# Altium PCB ES108FC1转接.PcbDoc
Units mm, origin at the board's own origin, x right, y up, seen from the top; angles counter-clockwise.
Board outline 30.99 x 32.26 mm, 4 copper layers (Top Layer, Layer 1, Layer 2, Bottom Layer), stack 0.603 mm thick; 3 components, 47 nets, 108 pads, 107 vias.
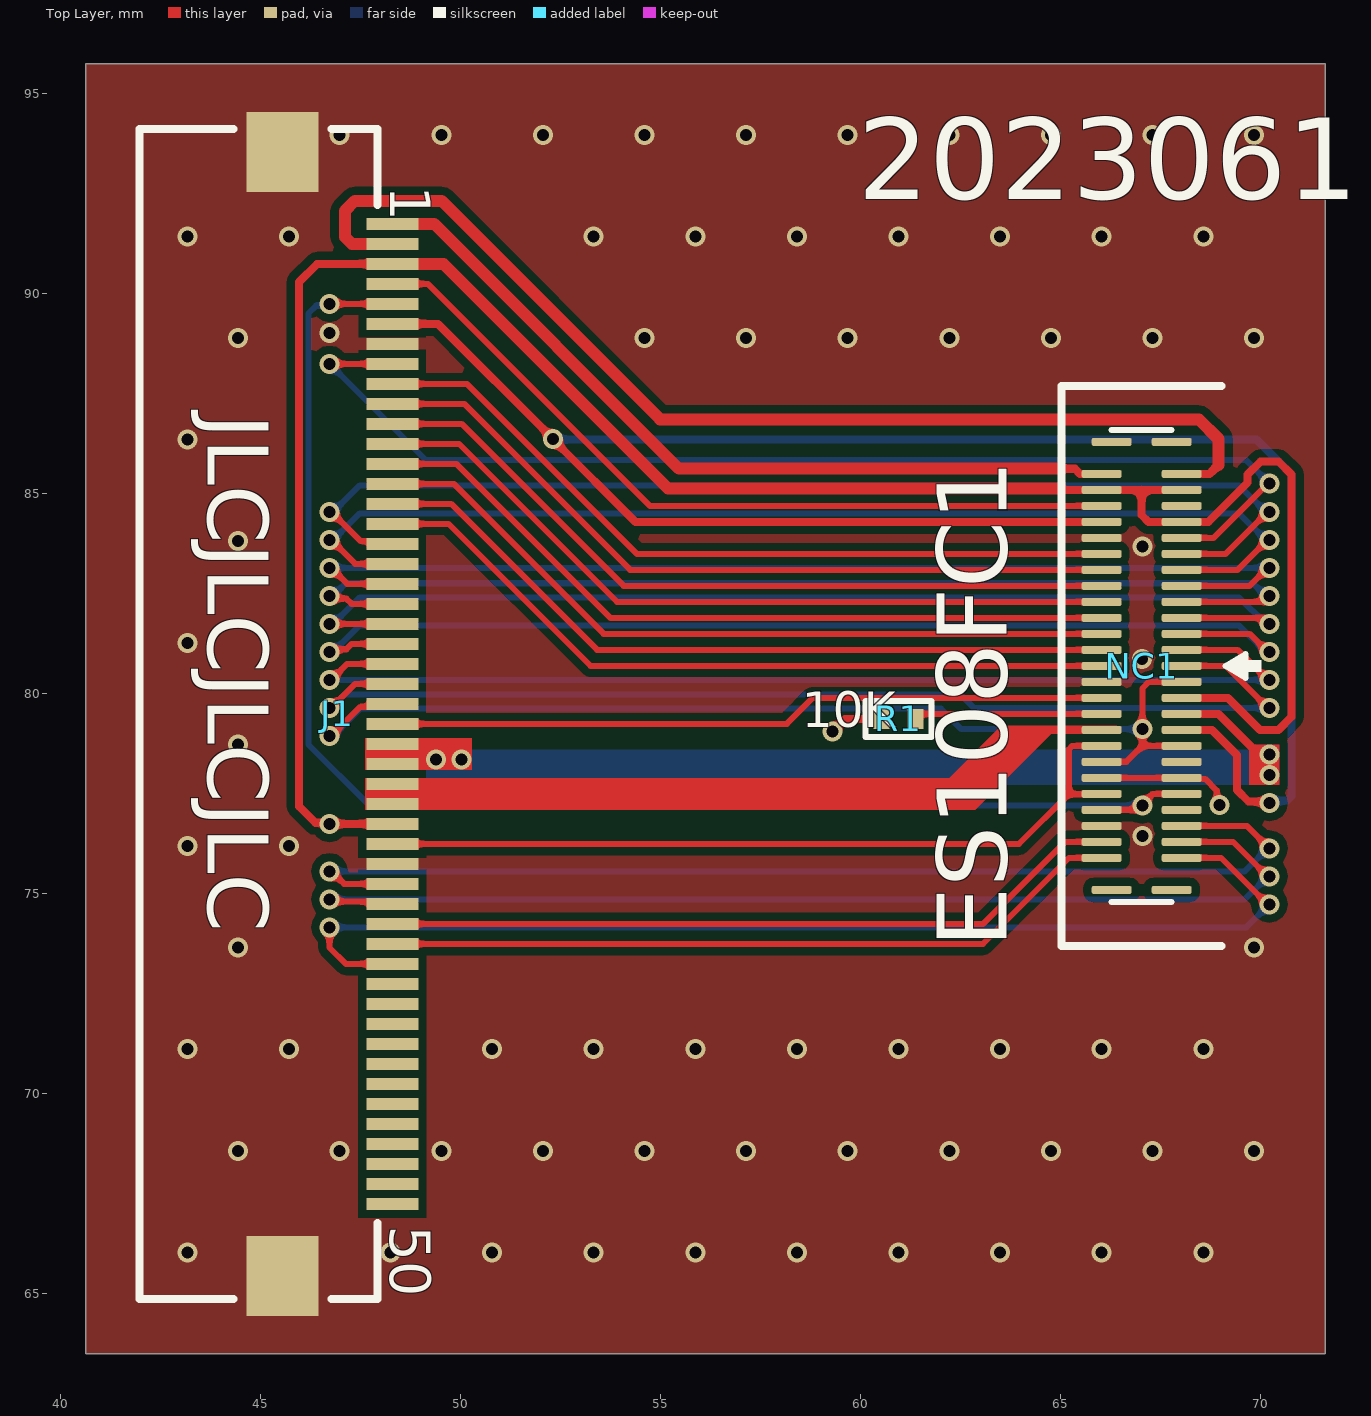
[diagram p0: Top Layer view]
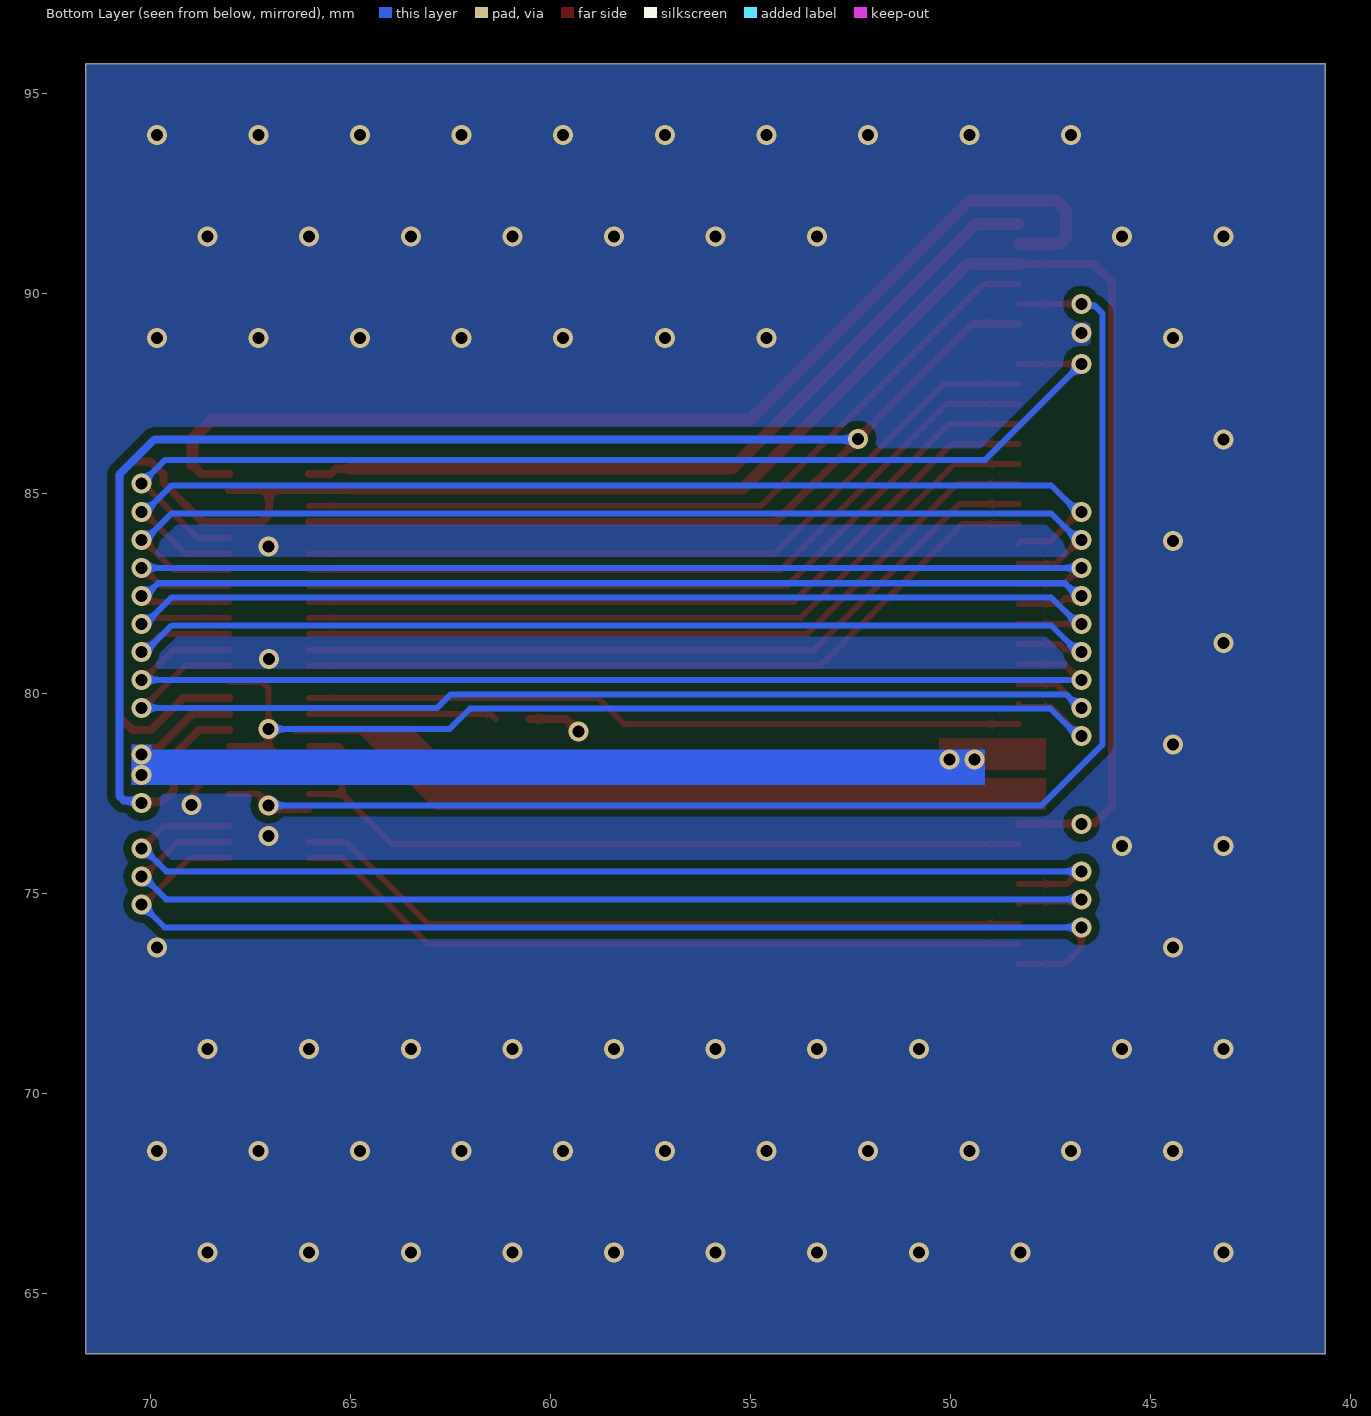
[diagram p1: Bottom Layer view, seen from below]
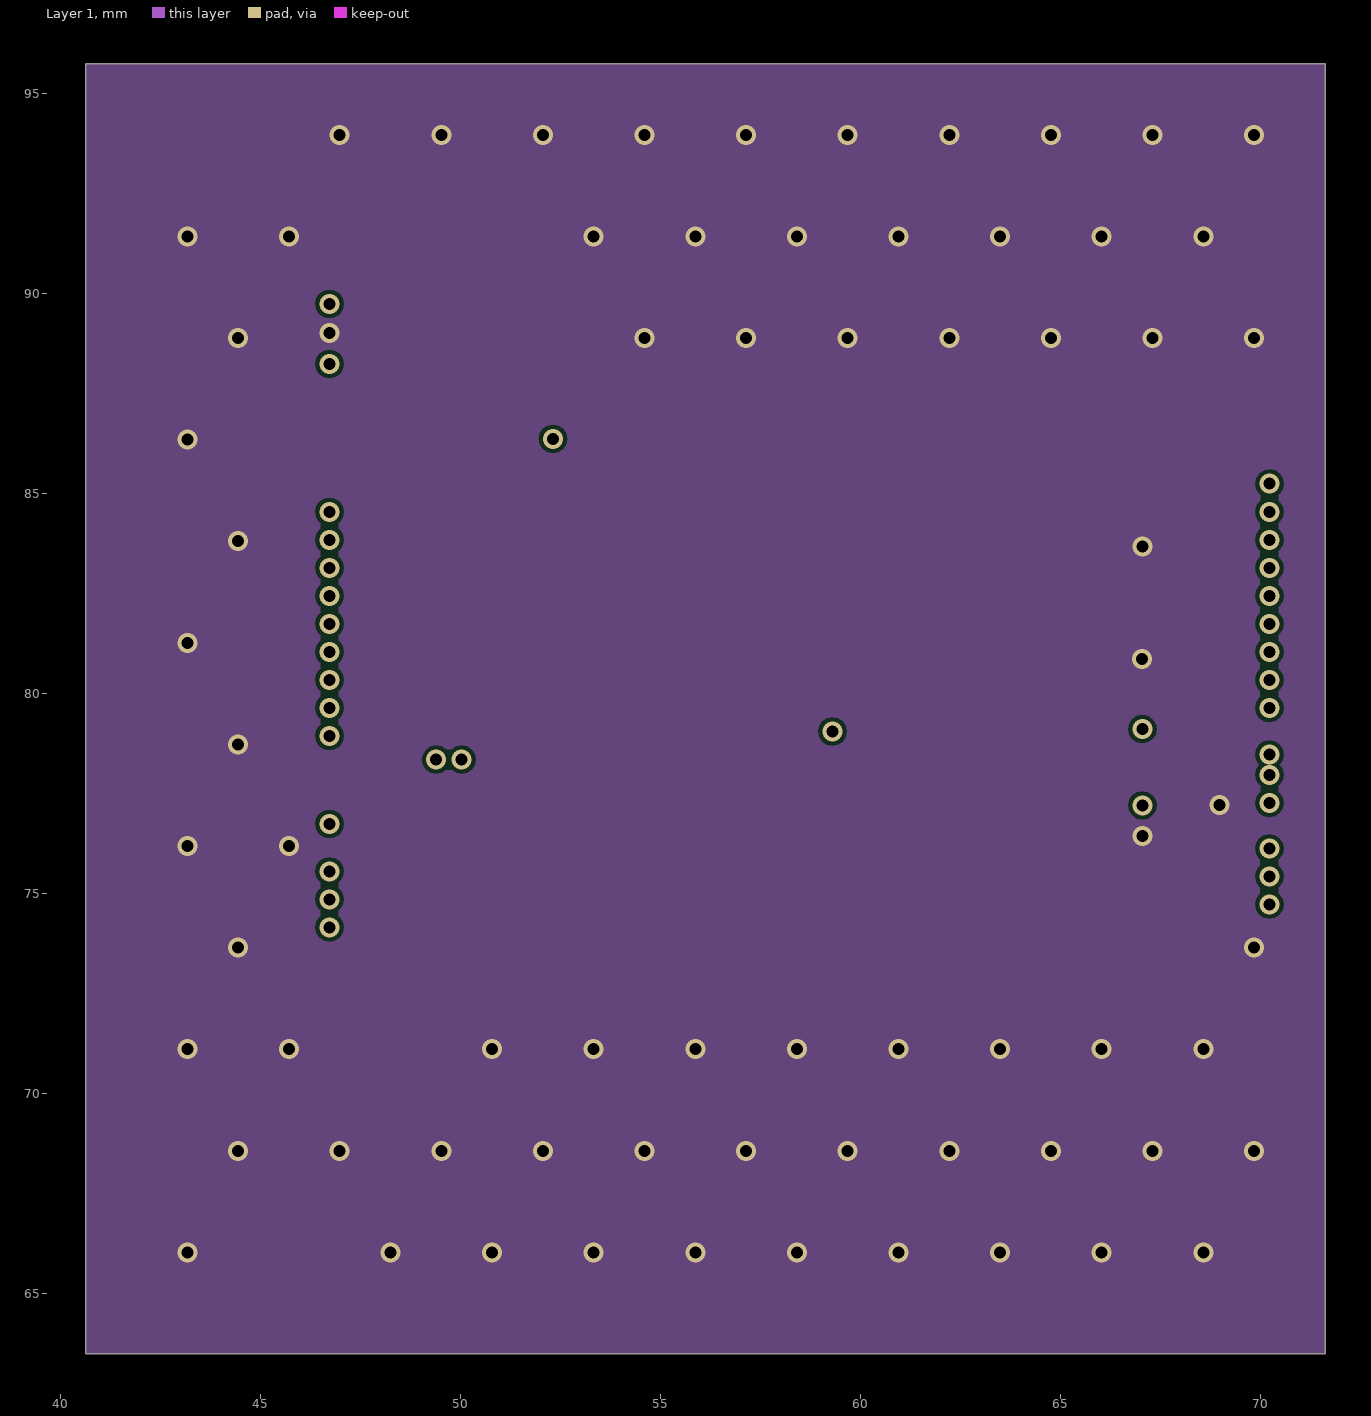
[diagram p2: Layer 1]
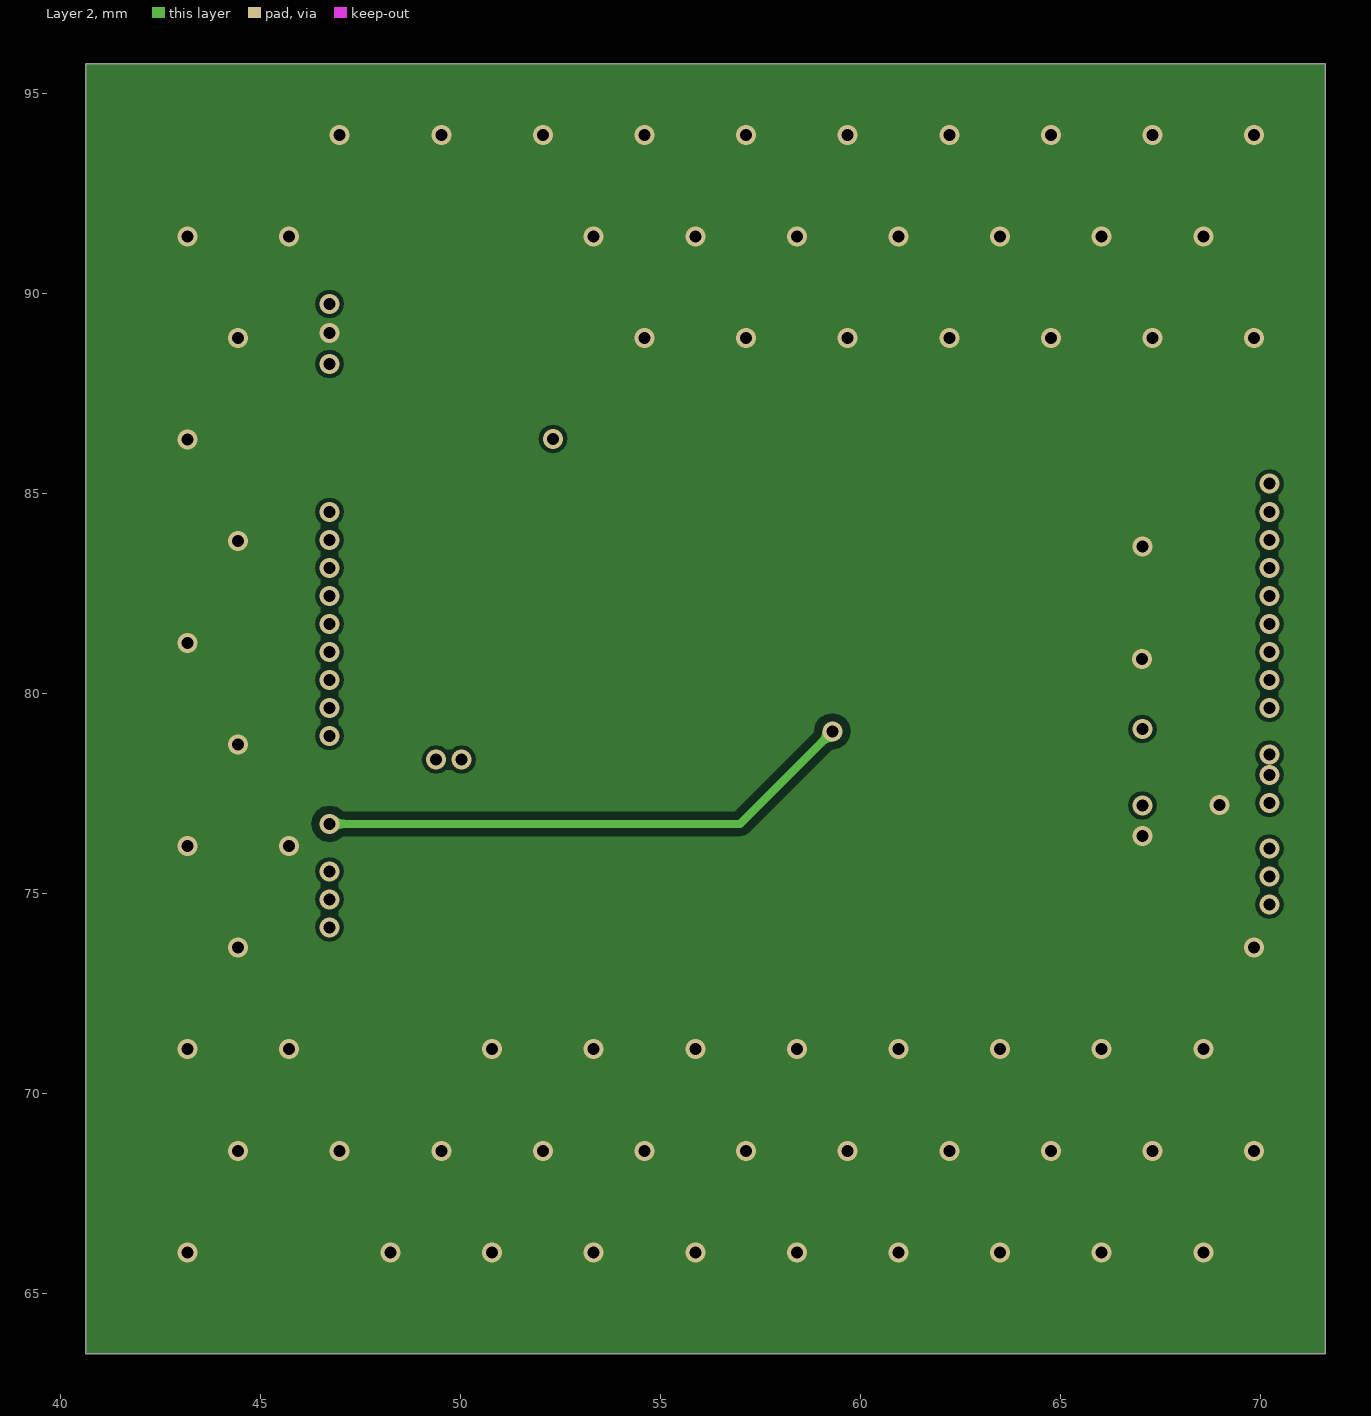
[diagram p3: Layer 2]

## Layer stack, top to bottom
Top Solder: solder mask 0.0102, Solder Resist, Dk 3.5
Top Layer: signal copper 0.0356
Dielectric 2: prepreg 0.0711, PP-006, Dk 4.1
Layer 1: signal copper 0.035
Dielectric 1: dielectric 0.32, FR-4, Dk 4.8
Layer 2: signal copper 0.035
Dielectric 3: prepreg 0.0711, PP-006, Dk 4.1
Bottom Layer: signal copper 0.0356
Bottom Solder: solder mask 0.0102, Solder Resist, Dk 3.5

## Board outline
40.64,63.5 40.64,95.758 71.628,95.758 71.628,63.5

## Design rules (kind name [scope] priority, off if disabled: settings)
Clearance [All] p1: gap=0.2 ignorepadtopadclearanceinfootprint=TRUE
HoleSize [All] p1: absolutevalues=TRUE maxlimit=2.54 minlimit=0.3 maxpercent=80.000 minpercent=20.000
HoleToHoleClearance [All] p1: gap=0 allowstackedmicrovias=TRUE
MinimumSolderMaskSliver [All] p1: minsoldermaskwidth=0
PlaneConnect [All] p1: planeconnectstyle=Direct reliefexpansion=0.508 reliefentries=4 reliefconductorwidth=0.254 reliefairgap=0.254
PolygonConnect [All] p1: connectstyle=Direct reliefconductorwidth=0.254 reliefentries=4 polygonreliefangle="90 Angle" airgapwidth=0.254
RoutingVias [All] p1: holewidth=0.3 width=0.5 viastyle="Through Hole" minholewidth=0.3 minwidth=0.5 maxholewidth=6.5 maxwidth=6.8
SilkToSilkClearance [All] p1: silktosilkclearance=0
SilkToSolderMaskClearance [IsPad] p1: minsilkscreentomaskgap=0 clearancetoexposedcopper=TRUE
SolderMaskExpansion [All] p1: expansion=0 istentingtop=FALSE
Width [All] p1: maxlimit=2.54 minlimit=0.127 preferedwidth=0.152
24 further rules are at their usual default settings.

## Components (designator, comment, footprint, x,y, rotation, side; value= is the part's Value field where it differs from the comment)
J1 "687150149022" 687150149022 44.958,79.502 r270 top
NC1 "AXE650124" AXE650124 67.04,80.702 r90 top
R1 "10K" R0402_L 60.96,79.375 r0 top

## Footprints (in the part's own frame and the unit in brackets; to place one, negate y for a bottom-side part, rotate by r counter-clockwise, add the part's x,y. Pads: shape width x height; smd on the part's side, far side on the other; paste and mask are expansions set on the pad)
687150149022 [mm] "0.50mm SMT ZIF Horizontal Hinge Type Bottom Contact, 50p"
  rect 0.3x1.3 smd: 1(-12.25,3.35) 2(-11.75,3.35) 3(-11.25,3.35) 4(-10.75,3.35) 5(-10.25,3.35) 6(-9.75,3.35) 7(-9.25,3.35) 8(-8.75,3.35) 9(-8.25,3.35) 10(-7.75,3.35) 11(-7.25,3.35) 12(-6.75,3.35) 13(-6.25,3.35) 14(-5.75,3.35) 15(-5.25,3.35) 16(-4.75,3.35) 17(-4.25,3.35) 18(-3.75,3.35) 19(-3.25,3.35) 20(-2.75,3.35) 21(-2.25,3.35) 22(-1.75,3.35) 23(-1.25,3.35) 24(-0.75,3.35) 25(-0.25,3.35) 26(0.25,3.35) 27(0.75,3.35) 28(1.25,3.35) 29(1.75,3.35) 30(2.25,3.35) 31(2.75,3.35) 32(3.25,3.35) 33(3.75,3.35) 34(4.25,3.35) 35(4.75,3.35) 36(5.25,3.35) 37(5.75,3.35) 38(6.25,3.35) 39(6.75,3.35) 40(7.25,3.35) 41(7.75,3.35) 42(8.25,3.35) 43(8.75,3.35) 44(9.25,3.35) 45(9.75,3.35) 46(10.25,3.35) 47(10.75,3.35) 48(11.25,3.35) 49(11.75,3.35) 50(12.25,3.35)
  rect 2x1.8 smd: MP1(-14.05,0.6) MP2(14.05,0.6)
  silkscreen extent -14.62,-2.98 14.63,2.98, body extent -14.55,-2.9 14.55,3.6, height 2.25
AXE650124 [mm]
  rrect50% 0.2x1 smd: 0(-5.6,-0.75) 0(-5.6,0.75) 0(5.6,-0.75) 0(5.6,0.75) 1(4.8,1) 2(4.8,-1) 3(4.4,1) 4(4.4,-1) 5(4,1) 6(4,-1) 7(3.6,1) 8(3.6,-1) 9(3.2,1) 10(3.2,-1) 11(2.8,1) 12(2.8,-1) 13(2.4,1) 14(2.4,-1) 15(2,1) 16(2,-1) 17(1.6,1) 18(1.6,-1) 19(1.2,1) 20(1.2,-1) 21(0.8,1) 22(0.8,-1) 23(0.4,1) 24(0.4,-1) 25(0,1) 26(0,-1) 27(-0.4,1) 28(-0.4,-1) 29(-0.8,1) 30(-0.8,-1) 31(-1.2,1) 32(-1.2,-1) 33(-1.6,1) 34(-1.6,-1) 35(-2,1) 36(-2,-1) 37(-2.4,1) 38(-2.4,-1) 39(-2.8,1) 40(-2.8,-1) 41(-3.2,1) 42(-3.2,-1) 43(-3.6,1) 44(-3.6,-1) 45(-4,1) 46(-4,-1) 47(-4.4,1) 48(-4.4,-1) 49(-4.8,1) 50(-4.8,-1)
  silkscreen extent -7,-3 7,2
R0402_L [mm] "1/16W贴片电阻"
  rect 0.4x0.5 smd: 1(-0.425,0) 2(0.425,0)
  silkscreen extent -0.82,-0.45 0.83,0.45, body extent -0.5,-0.25 0.5,0.25, height 0.3

## Part data
J1: library part CMP-1502-01644-1, "SMT ZIF Connectors Hinge Type WR-FPC, Horizontal, Bottom Contact, pitch 0.5 mm, 50 pins", Contact Resistance=50mOhm, Manufacturer="Wurth Elektronik", Operating Temperature=-40to105degC, Rated Current=0.5A, Withstanding Voltage=150VAC, Working Voltage=50VAC, Contact Design=BottomContact, Datasheet URL=https://katalog.we-online.de/em/datasheet/687150149022.pdf, Manufacturer URL=http://www.we-online.de, Mounting Technology=SMT, Orientation=Horizontal, Package Reference=687150149022, Packaging=TapeandReel, Part Number=687150149022, Pin Number=50, Pitch=0.5mm, Publisher=WurthElektronik
R1: library part R, "贴片电阻", BOM名称=贴片电阻, 封装库来自淘宝卖家ID：黄晶宝石=其他店铺购入均为盗版假冒封装库，请立即申请退款, 联系卖家，免费查找封装=唯一出售店铺网址https://shop463601444.taobao.com

## Via types
v1: diameter 0.5, hole 0.3, Top Layer to Bottom Layer, tented both sides, 107 vias

## Nets (pads, with @x,y where several pads share a name; then routed paths per layer and width w, separated by ;. In a path a pad name is that pad's centre, name@x,y a point inside that pad or via, vN(x,y) a via of type N, cw(c..) or ccw(c..) an arc to the next point about the centre after c; other vN are vias at no path point)
EPD_CKV: J1.4 NC1.5 | length 20
  Top Layer w0.152: J1.4 49.194,90.252 54.744,84.702 NC1.5
EPD_D0: J1.9 NC1.11 | length 19.5
  Top Layer w0.152: J1.9 50.17,87.752 54.42,83.502 NC1.11
EPD_D1: J1.10 NC1.13 | length 19.5
  Top Layer w0.152: J1.10 50.104,87.252 54.254,83.102 NC1.13
EPD_D2: J1.11 NC1.15 | length 19.4
  Top Layer w0.152: J1.11 50.039,86.752 54.089,82.702 NC1.15
EPD_D3: J1.12 NC1.17 | length 19.4
  Top Layer w0.152: J1.12 49.973,86.252 53.923,82.302 NC1.17
EPD_D4: J1.13 NC1.19 | length 19.3
  Top Layer w0.152: J1.13 49.907,85.752 53.757,81.902 NC1.19
EPD_D5: J1.14 NC1.21 | length 19.3
  Top Layer w0.152: J1.14 49.842,85.252 53.592,81.502 NC1.21
EPD_D6: J1.15 NC1.23 | length 19.2
  Top Layer w0.152: J1.15 49.776,84.752 53.426,81.102 NC1.23
EPD_D7: J1.16 NC1.25 | length 19.2
  Top Layer w0.152: J1.16 49.71,84.252 53.26,80.702 NC1.25
EPD_D8: J1.17 NC1.12 | length 28.6
  Top Layer w0.152: v1(46.736,84.552) 46.78,84.552 47.506,83.826 48.234,83.826 J1.17 ; NC1.12 69.137,83.502 70.187,84.552 v1(70.231,84.552)
  Bottom Layer w0.152: v1(46.736,84.552) 46.83,84.552 47.495,85.217 69.472,85.217 70.137,84.552 v1(70.231,84.552)
EPD_D9: J1.18 NC1.14 | length 28.4
  Top Layer w0.152: v1(46.736,83.852) 46.78,83.852 47.38,83.252 J1.18 ; NC1.14 69.437,83.102 70.187,83.852 v1(70.231,83.852)
  Bottom Layer w0.152: v1(46.736,83.852) 46.83,83.852 47.495,84.517 69.472,84.517 70.137,83.852 v1(70.231,83.852)
EPD_D10: J1.19 NC1.16 | length 27.6
  Top Layer w0.152: v1(46.736,83.152) 46.78,83.152 47.18,82.752 J1.19 ; NC1.16 69.737,82.702 70.187,83.152 v1(70.231,83.152)
  Bottom Layer w0.152: v1(46.736,83.152) v1(70.231,83.152)
EPD_D11: J1.20 NC1.18 | length 27.7
  Top Layer w0.152: v1(46.736,82.452) 46.803,82.385 47.157,82.385 47.29,82.252 J1.20 ; NC1.18 70.081,82.302 v1(70.231,82.452)
  Bottom Layer w0.152: v1(46.736,82.452) 46.83,82.452 47.147,82.769 69.82,82.769 70.137,82.452 v1(70.231,82.452)
EPD_D12: J1.21 NC1.20 | length 27.9
  Top Layer w0.152: v1(46.736,81.752) J1.21 ; NC1.20 70.081,81.902 v1(70.231,81.752)
  Bottom Layer w0.152: v1(46.736,81.752) 46.83,81.752 47.495,82.417 69.472,82.417 70.137,81.752 v1(70.231,81.752)
EPD_D13: J1.22 NC1.22 | length 28.1
  Top Layer w0.152: v1(46.736,81.052) 46.803,81.119 47.157,81.119 47.29,81.252 J1.22 ; NC1.22 69.737,81.502 70.187,81.052 v1(70.231,81.052)
  Bottom Layer w0.152: v1(46.736,81.052) 46.83,81.052 47.495,81.717 69.472,81.717 70.137,81.052 v1(70.231,81.052)
EPD_D14: J1.23 NC1.24 | length 27.7
  Top Layer w0.152: v1(46.736,80.352) 46.78,80.352 47.18,80.752 J1.23 ; NC1.24 69.437,81.102 70.187,80.352 v1(70.231,80.352)
  Bottom Layer w0.152: v1(46.736,80.352) v1(70.231,80.352)
EPD_D15: J1.24 NC1.26 | length 28.2
  Top Layer w0.152: v1(46.736,79.652) 46.78,79.652 47.38,80.252 J1.24 ; NC1.26 69.137,80.702 70.187,79.652 v1(70.231,79.652)
  Bottom Layer w0.152: v1(46.736,79.652) 46.78,79.652 47.118,79.99 62.504,79.99 62.842,79.652 v1(70.231,79.652)
EPD_DIR: J1.32 NC1.35 NC1.41 | length 20.2
  Top Layer w0.152: J1.32 63.973,76.252 65.216,77.495 ; NC1.41 66.033,77.495 65.216,77.495 ; NC1.35 65.305,78.702 65.216,78.613 65.216,77.495
EPD_KB_SCL: J1.48
EPD_KB_SDA: J1.49
EPD_KB_TP_INT_N: J1.46
EPD_KB_TP_RST_N: J1.47
EPD_KB_TP_STOP: J1.50
EPD_SPI_NCS: J1.35 NC1.48 | length 27.9
  Top Layer w0.152: v1(46.736,74.865) 46.793,74.808 48.251,74.808 J1.35 ; NC1.48 69.323,76.302 70.187,75.438 v1(70.231,75.438)
  Bottom Layer w0.152: v1(46.736,74.865) 69.614,74.865 70.187,75.438 v1(70.231,75.438)
EPD_SPI_SCL: J1.36 NC1.47 | length 18.6
  Top Layer w0.152: J1.36 63.076,74.252 65.126,76.302 NC1.47
EPD_SPI_SDI: J1.37 NC1.49 | length 18.6
  Top Layer w0.152: J1.37 63.074,73.752 65.224,75.902 NC1.49
EPD_SPI_SDO: J1.38 NC1.50 | length 28.7
  Top Layer w0.152: v1(46.736,74.165) 46.736,73.66 47.144,73.252 J1.38 ; NC1.50 69.023,75.902 70.187,74.738 v1(70.231,74.738)
  Bottom Layer w0.152: v1(46.736,74.165) 69.658,74.165 v1(70.231,74.738)
EPD_SPV: J1.5 NC1.42 NC1.43 | length 36.6
  Top Layer w0.152: v1(46.736,89.752) J1.5 ; NC1.43 66.848,77.102 66.962,77.216 v1(67.056,77.216) 67.056,77.246 67.312,77.502 NC1.42
  Bottom Layer w0.152: v1(46.736,89.752) 46.696,89.711 46.404,89.711 46.21,89.517 46.21,78.734 47.728,77.216 v1(67.056,77.216)
EPD_VCOM: J1.6 NC1.7 NC1.34 | length 50.8
  Top Layer w0.2: J1.6 49.45,89.252 52.315,86.387 52.315,86.369 54.382,84.302 NC1.7 ; NC1.34 68.795,79.102 69.423,78.474 69.423,77.6 69.716,77.307 70.198,77.307 v1(70.231,77.274)
  Bottom Layer w0.2: v1(52.324,86.378) 52.342,86.36 69.913,86.36 70.787,85.486 70.787,77.449 70.67,77.331 70.288,77.331 v1(70.231,77.274)
EPD_VEE_-20V: J1.1 NC1.1 | length 20.3
  Top Layer w0.2: 65.024,85.635 65.368,85.635 65.501,85.502 NC1.1
  Top Layer w0.3: J1.1 49.354,91.752 55.471,85.635 65.024,85.635
EPD_VGG_+22V: J1.2 NC1.2 | length 28
  Top Layer w0.2: NC1.2 68.738,85.502 68.961,85.725
  Top Layer w0.3: J1.2 47.293,91.252 47.117,91.428 47.117,92.075 47.371,92.329 49.539,92.329 55,86.868 68.467,86.868 68.961,86.374 68.961,85.725
EPD_VNEG_-15V: J1.29 J1.30 NC1.33
EPD_VPOS_+15V: J1.27 J1.28 NC1.32 | length 2.6
  Top Layer w0.2: NC1.32 68.961,79.502 69.823,78.64 70.077,78.64 v1(70.231,78.486)
  other v1: 70.231,77.978 49.403,78.359 50.038,78.359
EPD_XCL: J1.8 NC1.10 | length 29.1
  Top Layer w0.152: v1(46.736,88.252) J1.8 ; NC1.10 68.837,83.902 70.193,85.258 v1(70.237,85.258)
  Bottom Layer w0.152: v1(46.736,88.252) 49.136,85.852 69.643,85.852 v1(70.237,85.258)
EPD_XLE: J1.26 NC1.29 | length 18
  Top Layer w0.152: J1.26 58.17,79.252 58.82,79.902 NC1.29
EPD_XSTL: J1.25 NC1.28 NC1.36 NC1.37 | length 27.4
  Top Layer w0.152: v1(46.736,78.952) 46.78,78.952 47.506,79.678 48.234,79.678 J1.25 ; NC1.37 66.656,78.302 67.056,78.702 ; NC1.36 67.056,78.702 ; NC1.28 67.221,80.302 67.056,80.137 67.056,78.702
  Bottom Layer w0.152: v1(46.736,78.952) 46.83,78.952 47.516,79.638 62.018,79.638 62.535,79.121 v1(67.056,79.121)
FP_FIRE_INT_N: J1.45
FP_LED_CTRL: J1.44
GND: J1.7 J1.33 J1.MP1 J1.MP2 NC1.9 NC1.27 NC1.39 NC1.40 NC1.45 | length 3.4
  Top Layer w0.152: NC1.39 NC1.40 68.064,77.878 68.625,77.878 68.918,77.585 68.918,77.295 v1(68.984,77.228)
  other v1: 43.18,66.04 48.26,66.04 50.8,66.04 53.34,66.04 55.88,66.04 58.42,66.04 60.96,66.04 63.5,66.04 66.04,66.04 68.58,66.04 44.45,68.58 46.99,68.58 49.53,68.58 52.07,68.58 54.61,68.58 57.15,68.58 59.69,68.58 62.23,68.58 64.77,68.58 67.31,68.58 69.85,68.58 43.18,71.12 45.72,71.12 50.8,71.12 53.34,71.12 55.88,71.12 58.42,71.12 60.96,71.12 63.5,71.12 66.04,71.12 68.58,71.12 44.45,73.66 69.85,73.66 43.18,76.2 45.72,76.2 67.056,76.454 44.45,78.74 67.047,80.878 43.18,81.28 67.056,83.693 44.45,83.82 43.18,86.36 44.45,88.9 54.61,88.9 57.15,88.9 59.69,88.9 62.23,88.9 64.77,88.9 67.31,88.9 69.85,88.9 46.736,89.027 43.18,91.44 45.72,91.44 53.34,91.44 55.88,91.44 58.42,91.44 60.96,91.44 63.5,91.44 66.04,91.44 68.58,91.44 46.99,93.98 49.53,93.98 52.07,93.98 54.61,93.98 57.15,93.98 59.69,93.98 62.23,93.98 64.77,93.98 67.31,93.98 69.85,93.98
HUB_N: J1.39
HUB_P: J1.40
NetNC1_31: NC1.31 R1.2 | length 4.7
  Top Layer w0.152: R1.2 61.385,79.378 61.509,79.502 NC1.31
RXD: J1.42
TXD: J1.43
VCC_1V8: J1.34 NC1.46 | length 27.9
  Top Layer w0.152: v1(46.736,75.565) 46.786,75.565 47.099,75.252 J1.34 ; NC1.46 69.667,76.702 v1(70.231,76.138)
  Bottom Layer w0.152: v1(46.736,75.565) 69.614,75.565 70.187,76.138 v1(70.231,76.138)
VCC_3V3: J1.3 J1.31 NC1.3 NC1.4 NC1.8 NC1.30 R1.1 | length 69.7
  Top Layer w0.2: J1.31 v1(46.736,76.752) 46.708,76.78 46.386,76.78 45.974,77.192 45.974,90.297 46.429,90.752 J1.3 ; v1(59.309,79.063) 59.621,79.375 R1.1 ; 65.024,85.135 65.057,85.102 NC1.3 67.04,85.102 ; NC1.30 69.196,79.902 69.996,79.102 70.459,79.102 70.787,79.43 70.787,85.486 70.465,85.808 70.009,85.808 69.687,85.486 69.687,85.283 68.705,84.302 NC1.8 67.209,84.302 67.04,84.471 67.04,85.102 ; NC1.4 67.04,85.102
  Top Layer w0.3: J1.3 49.583,90.752 55.2,85.135 65.024,85.135
  Layer 2 w0.2: v1(46.736,76.752) 56.998,76.752 v1(59.309,79.063)
VCC_5V: J1.41
pads on no net: NC1.0 NC1.6 NC1.38 NC1.44

## Polygon pours and split planes (outlines as drawn)
GND on Top Layer "GND_L01_P011" (solid, remove dead copper, pour order 11): 40.64,63.5 40.64,95.758 71.628,95.758 71.628,63.5
GND on Bottom Layer "GND_L04_P012" (solid, remove dead copper, pour order 12): 40.64,63.5 40.64,95.758 71.628,95.758 71.628,63.5
GND on Layer 1 "GND_L02_P009" (solid, remove dead copper, pour order 9): 40.64,63.5 40.64,95.758 71.628,95.758 71.628,63.5
GND on Layer 2 "GND_L03_P010" (solid, remove dead copper, pour order 10): 40.64,63.5 40.64,95.758 71.628,95.758 71.628,63.5

## Other copper
Top Layer:
  rectangle net EPD_VNEG_-15V: 47.625,77.102 62.23,77.901
  rectangle net EPD_VPOS_+15V: 47.625,78.102 50.292,78.901
  rectangle net EPD_VPOS_+15V: 69.723,77.724 70.485,78.74
  region net EPD_VNEG_-15V: 62.103,77.774 63.53,79.201 66.421,79.201 66.421,79.004 64.78,79.004 62.878,77.102 62.103,77.102
Bottom Layer:
  rectangle net EPD_VPOS_+15V: 49.149,77.724 70.104,78.613
  rectangle net EPD_VPOS_+15V: 69.977,77.724 70.485,78.74

## Silkscreen, mask and mechanical layers (free items; w line width, h text height)
Top Overlay:
  text "20230611" at 59.944,91.694 h3.5
  text "JLCJLCJLCJLC" at 43.688,86.995 h1.52 r270
  text "10K" at 58.547,78.867 h1.52
  text "ES108FC1" at 64.247,73.658 h3 r90
Mechanical 1:
  lines w0.1: 40.64,63.5 71.628,63.5 71.628,72.39 71.628,95.758 40.64,95.758 40.64,63.5

## Text inside footprints (layer, text, board x,y; h text height)
J1: Top Overlay "1" at 48.258,92.702 h1.02 r270; Top Overlay "50" at 48.258,66.702 h1.02 r270